# Altium PCB Glucometer-I.C.- RF Module V4.PcbDoc
Units mm, origin at the board's own origin, x right, y up, seen from the top; angles counter-clockwise.
Board outline 152.4 x 101.6 mm, 2 copper layers (Top Layer, Bottom Layer); 3 components, 13 nets, 26 pads, 0 vias.
Unrouted connection lines stored in the file: 1.
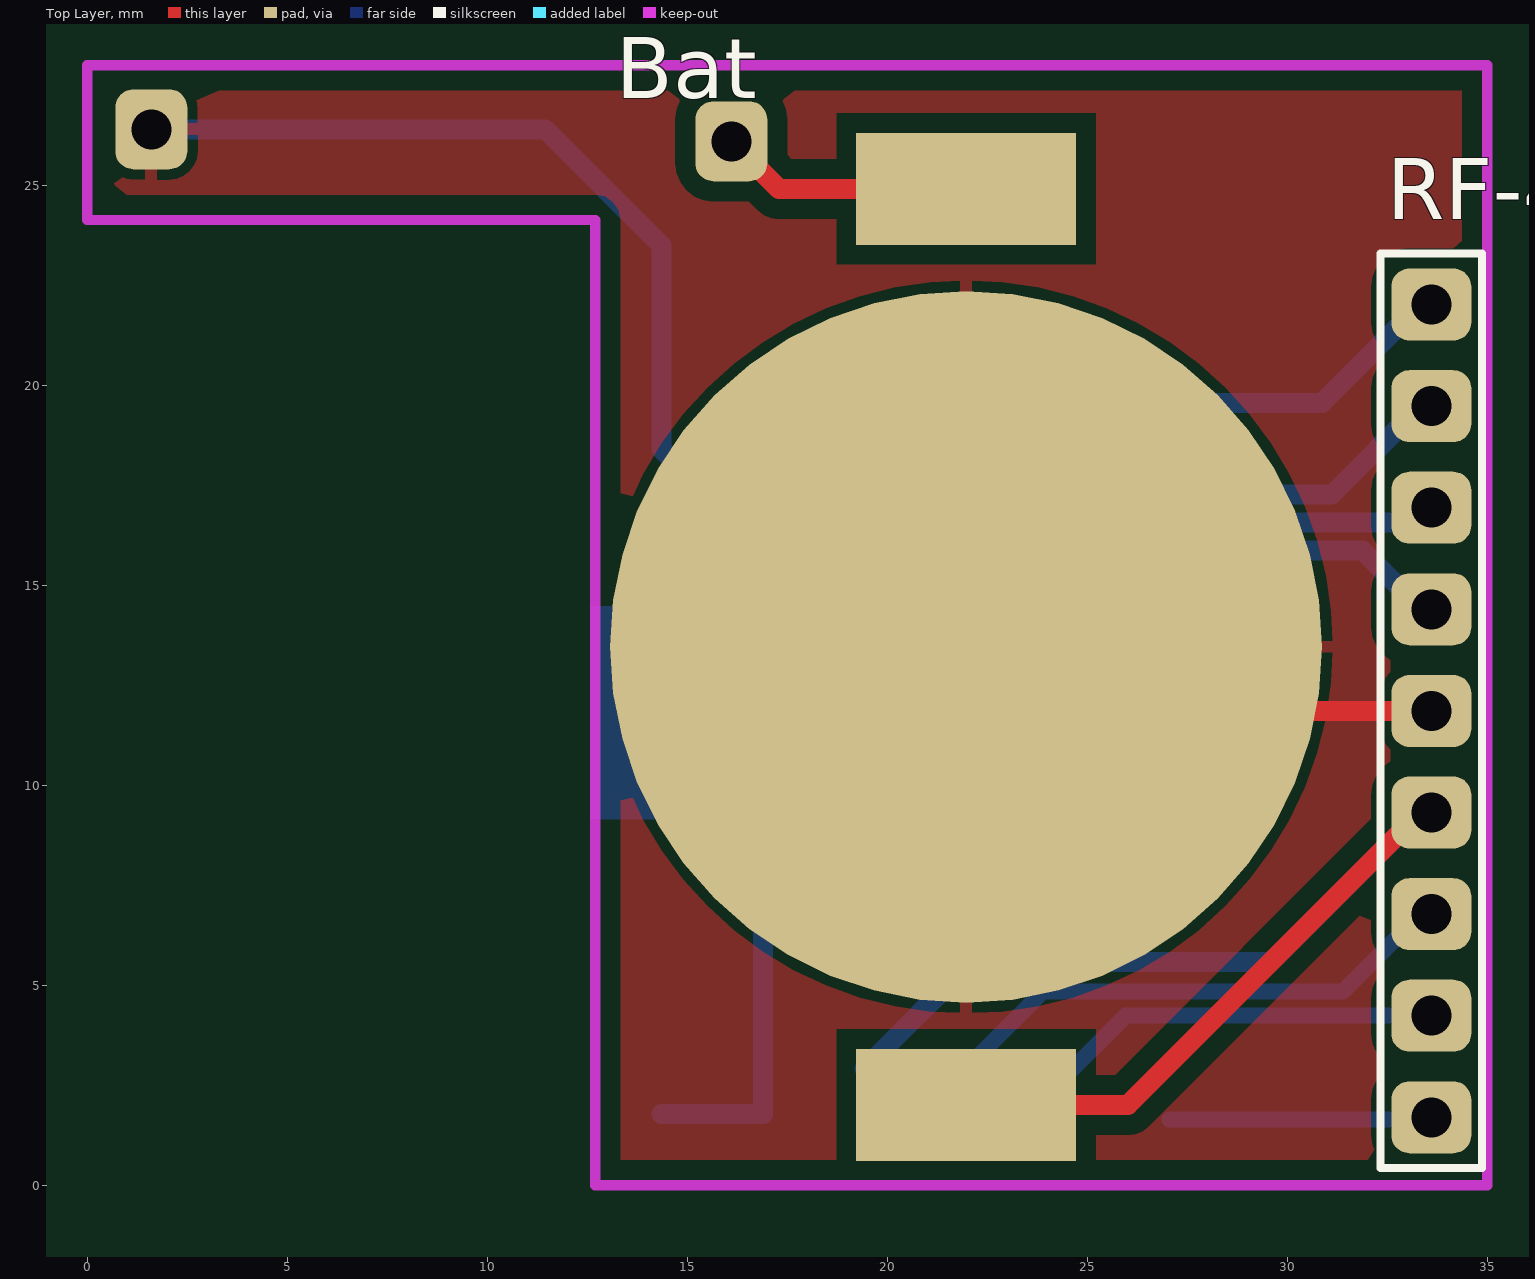
[diagram p0: Top Layer view]
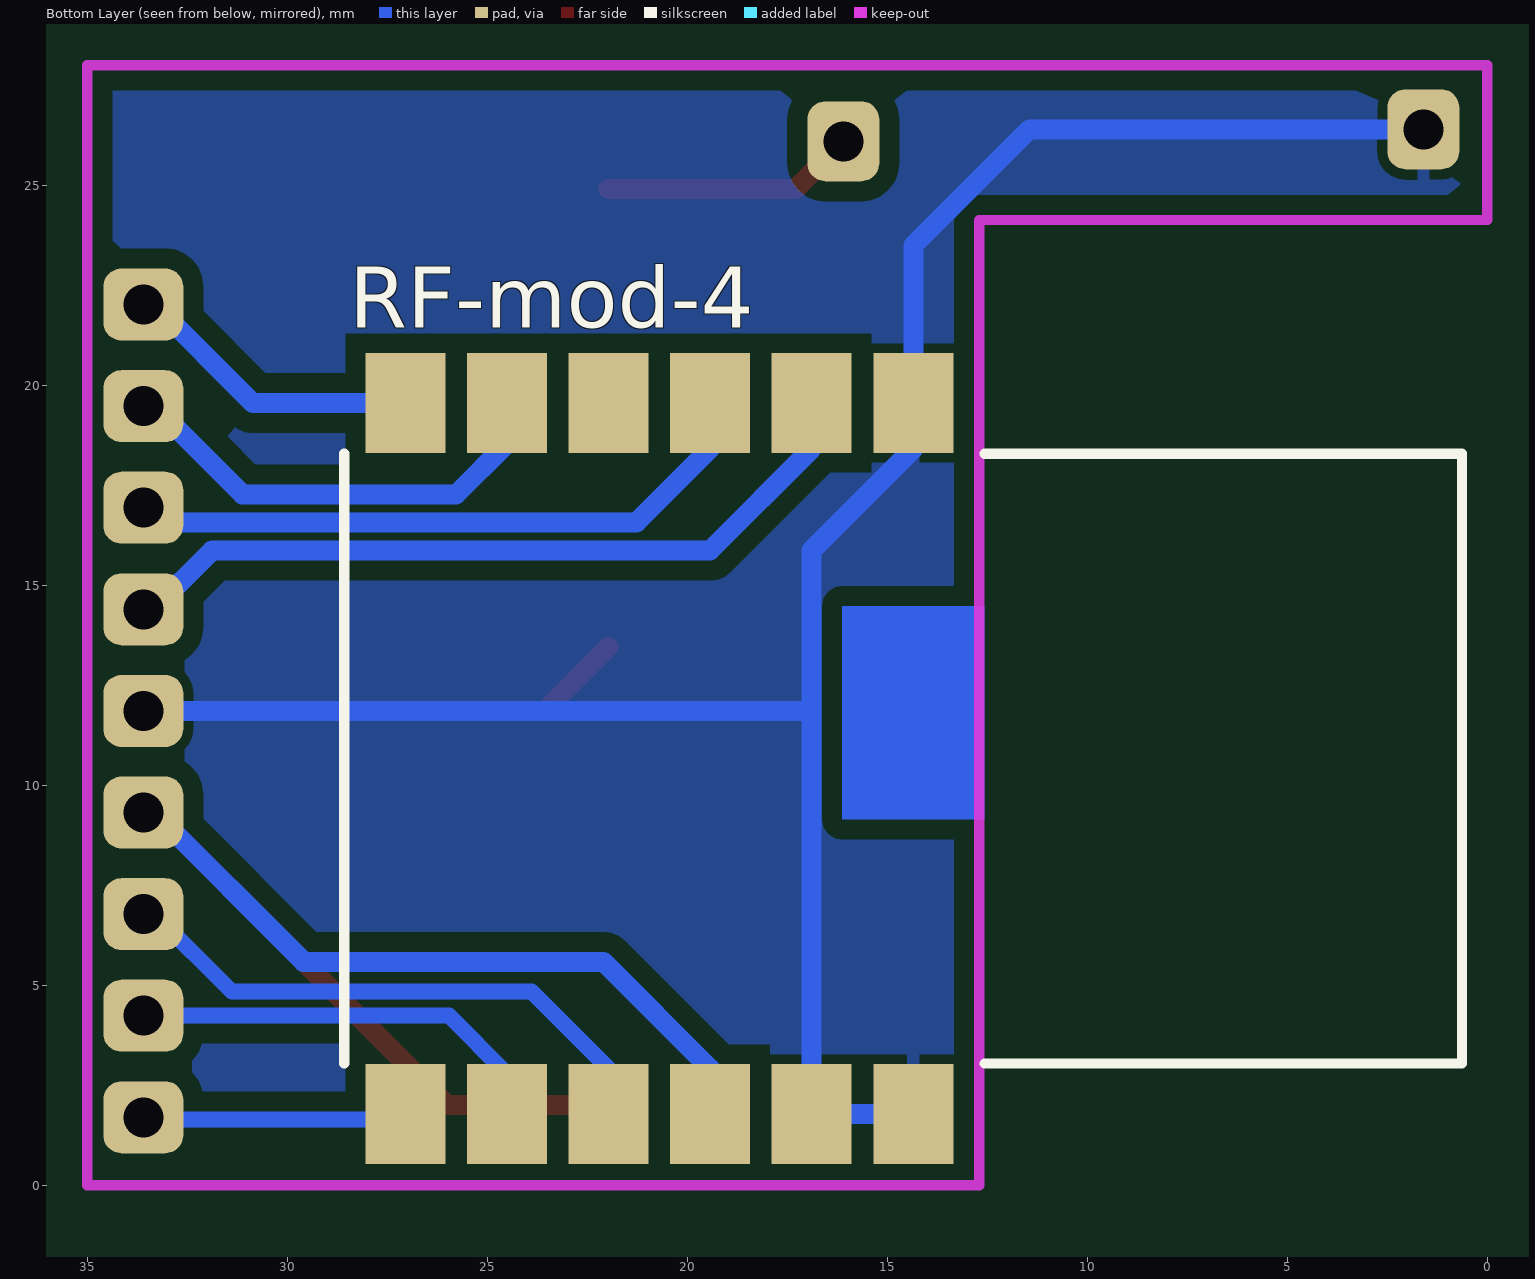
[diagram p1: Bottom Layer view, seen from below]

## Layer stack, top to bottom
Top Layer: signal copper 0.0356
Dielectric: dielectric 0.32, FR-4, Dk 4.8
Bottom Layer: signal copper 0.0356

## Board outline
-56.461,-50.011 95.939,-50.011 95.939,51.589 -56.461,51.589

## Design rules (kind name [scope] priority, off if disabled: settings)
Clearance [All] p1: gap=0.2
PolygonConnect [All] p1: connectstyle=Relief reliefconductorwidth=0.3 reliefentries=4 polygonreliefangle="90 Angle" airgapwidth=0.25
RoutingVias [All] p1: holewidth=0.7 width=1.5 viastyle="Through Hole" minholewidth=0.5 minwidth=1 maxholewidth=1 maxwidth=2
SolderMaskExpansion [All] p1: expansion=0.102
Width [All] p1: maxlimit=5 minlimit=0.25 preferedwidth=0.4 minimp=50.000000 maximp=50.000000 favimp=50.000000
28 further rules are at their usual default settings.

## Components (designator, comment, footprint, x,y, rotation, side; value= is the part's Value field where it differs from the comment)
Bat "Battery" "CR2032 Coin Holder" 21.971,13.462 r90 top
RF-4 "Header 9" HDR1X9 33.6,1.7 r90 top
RF-mod-4 "MRF89XAM8A" MRF89XAM8A 28.575,19.558 r270 bottom

## Footprints (in the part's own frame and the unit in brackets; to place one, negate y for a bottom-side part, rotate by r counter-clockwise, add the part's x,y. Pads: shape width x height; smd on the part's side, far side on the other; paste and mask are expansions set on the pad)
"CR2032 Coin Holder" [mm] "Coin Battery Holder - CR2032"
  rect 2.8x5.5 smd: 1(-11.45,0) 1(11.45,0)
  round 17.8 smd: 2(0,0)
HDR1X9 [mm] "Connector; Header; 9 Position"
  rrect50% 1.8x2 hole 1: 1(0,0) 2(2.54,0) 3(5.08,0) 4(7.62,0) 5(10.16,0) 6(12.7,0) 7(15.24,0) 8(17.78,0) 9(20.32,0)
  silkscreen extent -1.27,-1.27 21.59,1.27
MRF89XAM8A [mm] "RF Module"
  rect 2.5x2 smd: 1(0,14.224) 2(0,11.684) 3(0,9.144) 4(0,6.604) 5(0,4.064) 6(0,1.524) 7(17.78,1.524) 8(17.78,4.064) 9(17.78,6.604) 10(17.78,9.144) 11(17.78,11.684) 12(17.78,14.224)
  Top Layer region: 5.08,16.002 10.414,16.002 10.414,12.446 5.08,12.446
  silkscreen extent 1.27,0 16.51,27.94, body extent 0,0 17.78,27.94, height 1.91

## Part data
Bat: "Multicell Battery"
RF-4: "Header, 9-Pin"
RF-mod-4: "RF Module. 868MHz Ultra Low Power Sub-Ghz Transceiver Module"

## Free pads (board coordinates)
  rrect50% 1.8x2 hole 1: 0(1.6,26.4) 1(16.1,26.1)

## Nets (pads, with @x,y where several pads share a name; then routed paths per layer and width w, separated by ;. In a path a pad name is that pad's centre, name@x,y a point inside that pad or via, vN(x,y) a via of type N, cw(c..) or ccw(c..) an arc to the next point about the centre after c; other vN are vias at no path point)
3.3V: Bat.1 pad.1 RF-4.4 RF-mod-4.10 | length 39
  Top Layer w0.4: RF-4.4@33.323,9.32 RF-4.4
  Top Layer w0.5: pad.1 17.288,24.912 Bat.1@21.971,24.912 ; Bat.1@21.971,2.012 26.015,2.012 RF-4.4@33.323,9.32
  Bottom Layer w0.4: RF-mod-4.10 RF-mod-4.10@19.431,2.921 ; RF-4.4@33.323,9.32 RF-4.4
  Bottom Layer w0.5: RF-mod-4.10@19.431,2.921 22.098,5.588 29.591,5.588 RF-4.4@33.323,9.32
CSCON: RF-4.7 RF-mod-4.3 | length 16.2
  Bottom Layer w0.5: RF-mod-4.3 19.431,18.415 21.274,16.572 33.232,16.572 RF-4.7
CSDATA: RF-4.2 RF-mod-4.8 | length 10.7
  Bottom Layer w0.4: RF-mod-4.8 24.511,2.794 25.957,4.24 RF-4.2
GND: Bat.2 pad.0 RF-4.5 RF-mod-4.1 RF-mod-4.11 RF-mod-4.12 | length 68.1
  Top Layer w0.5: Bat.2 23.573,11.86 RF-4.5
  Bottom Layer w0.5: pad.0 11.446,26.4 14.351,23.495 RF-mod-4.1 14.351,18.415 16.891,15.875 RF-mod-4.11 RF-mod-4.12 ; 17.067,11.86 RF-4.5
IRQ1: RF-4.3 RF-mod-4.9 | length 14.4
  Bottom Layer w0.4: RF-mod-4.9 21.971,2.921 23.89,4.84 31.383,4.84 33.323,6.78 RF-4.3
NetCON1_3: 
NetCON1_4: 
NetCON1_8: 
NetMRF89XAM8A_4: RF-mod-4.4
RESET: RF-4.6 RF-mod-4.2 | length 19.5
  Bottom Layer w0.5: RF-mod-4.2 16.891,18.415 19.434,15.872 31.88,15.872 33.352,14.4 RF-4.6
SCK: RF-4.9 RF-mod-4.6 | length 7.6
  Bottom Layer w0.5: RF-mod-4.6 30.861,19.558 33.323,22.02 RF-4.9
SDI: RF-4.8 RF-mod-4.5 | length 11.5
  Bottom Layer w0.5: RF-mod-4.5 24.511,18.542 25.781,17.272 31.115,17.272 33.323,19.48 RF-4.8
SDO: RF-4.1 RF-mod-4.7 | length 6.6
  Bottom Layer w0.254: RF-4.1@33.551,1.651 RF-4.1
  Bottom Layer w0.4: RF-mod-4.7@27.051,1.651 RF-4.1@33.551,1.651

## Polygon pours and split planes (outlines as drawn)
GND on Top Layer "Bottom Layer-No Net" (solid, pour order 3): 0,24.13 0,28 35,28 35,0 12.7,0 12.7,24.13
GND on Bottom Layer "Bottom Layer-No Net" (solid, pour order 5): 0,24.13 0,28 35,28 35,0 12.7,0 12.7,24.13

## Keep-outs
Keep-Out Layer:
  lines w0.254: 0,24.13 12.7,24.13 12.7,0 35,0 35,28 0,28 0,24.13